# Altium PCB Kit_Rele_v1_PCB.PcbDoc
Units mm, origin at the board's own origin, x right, y up, seen from the top; angles counter-clockwise.
Board outline 50 x 20 mm, 2 copper layers (Top Layer, Bottom Layer), stack 1.671 mm thick; 6 components, 8 nets, 18 pads, 4 vias.
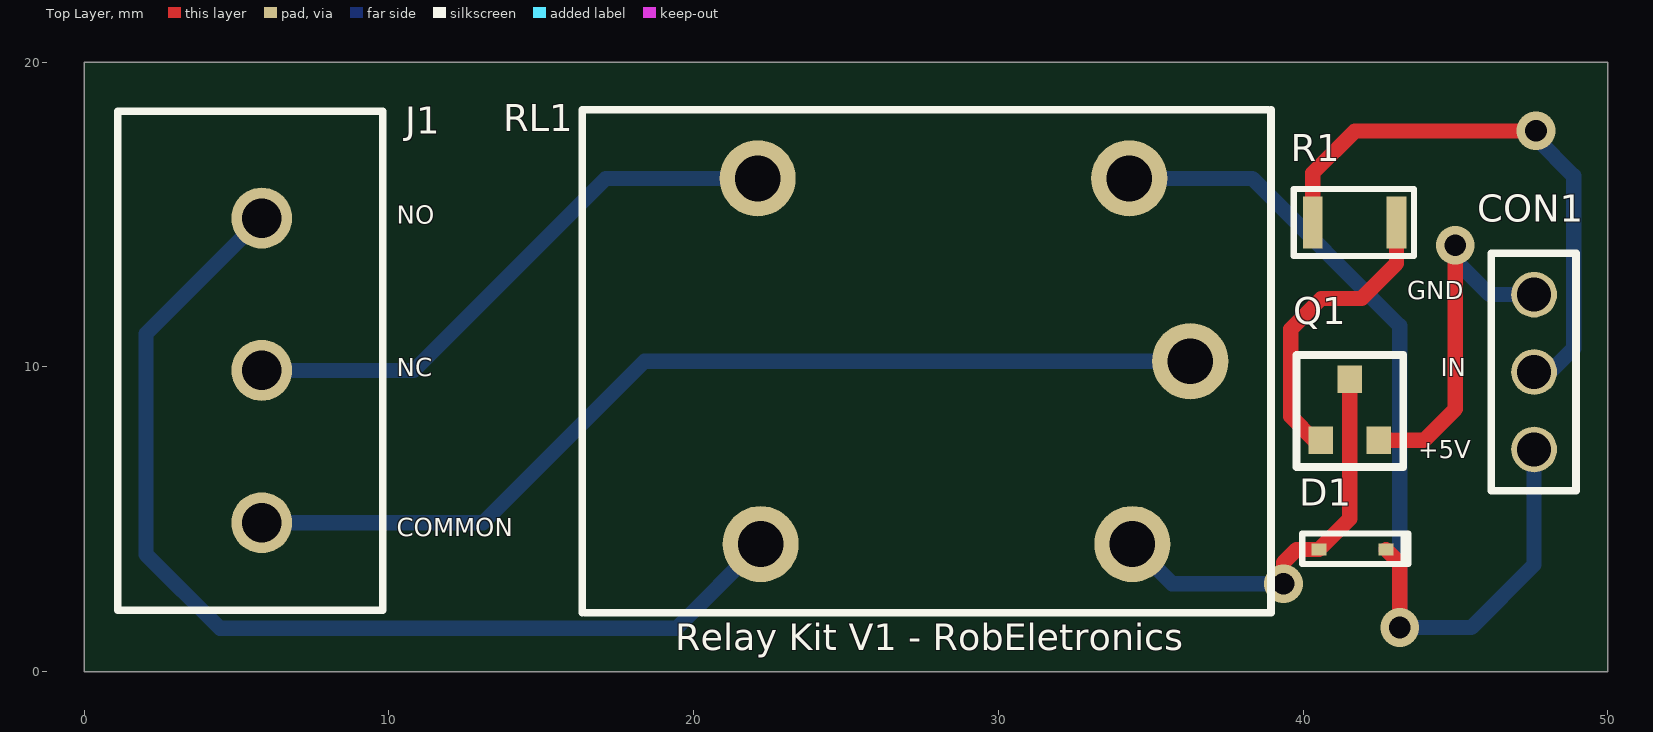
[diagram p0: Top Layer view]
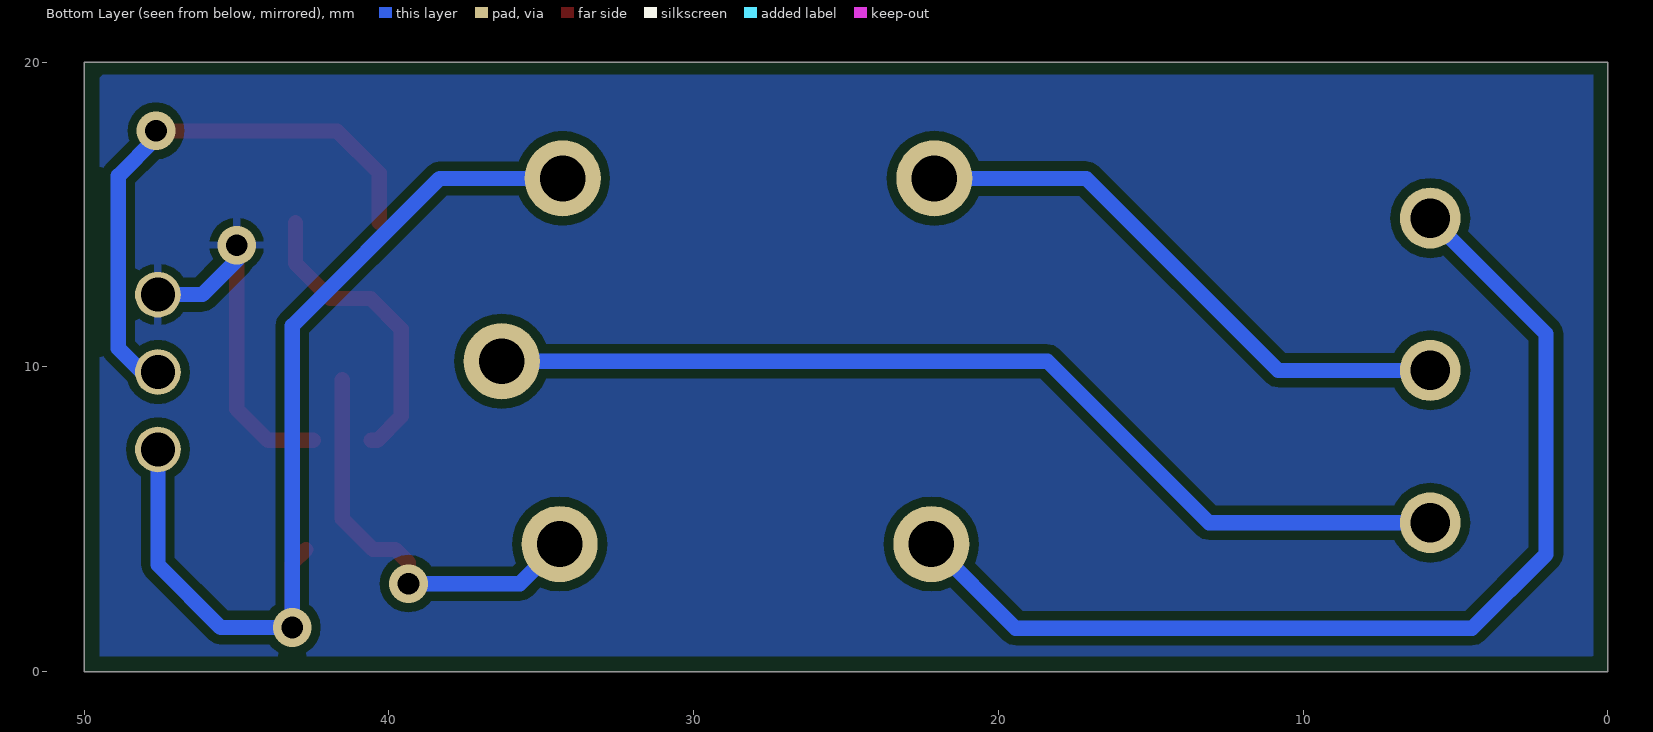
[diagram p1: Bottom Layer view, seen from below]
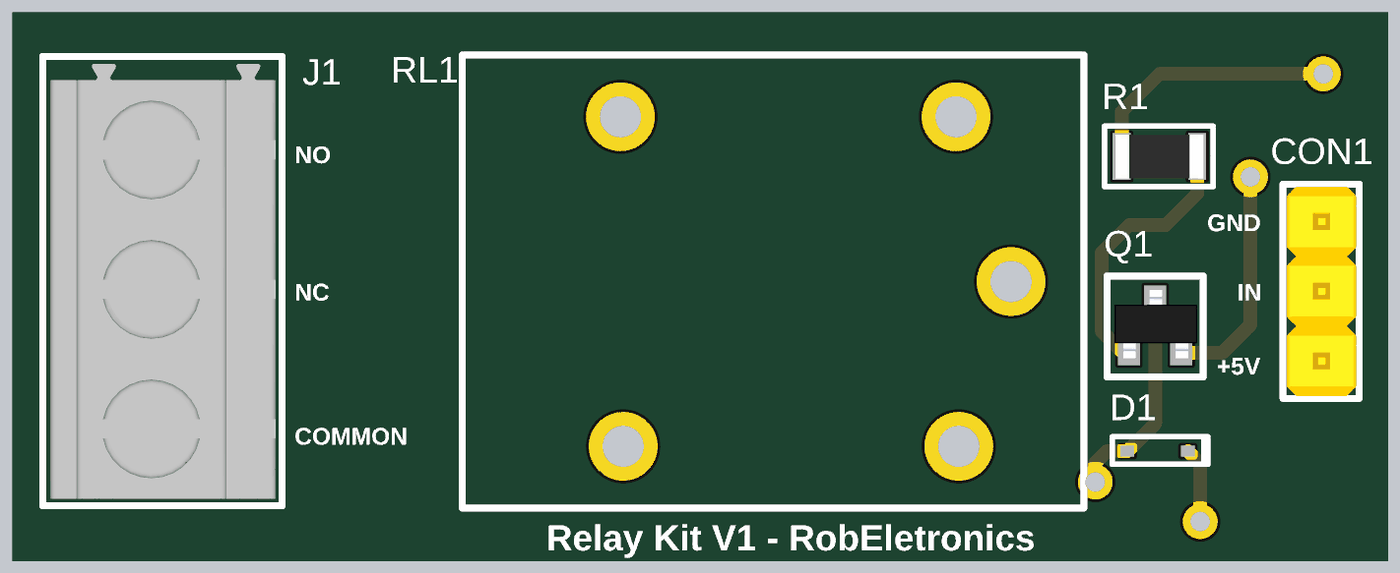
[diagram p2: 3D render of the assembled board from above, using the file's embedded part models]

## Layer stack, top to bottom
Top Solder: solder mask 0.0102, Solder Resist, Dk 3.5
Top Layer: signal copper 0.0356
Dielectric 1: dielectric 1.6, FR-4, Dk 4.8
Bottom Layer: signal copper 0.0356
Bottom Solder: solder mask 0.0102, Solder Resist, Dk 3.5

## Board outline
0,20 0,0 50,0 50,20

## Design rules (kind name [scope] priority, off if disabled: settings)
Clearance [All] p1: gap=0.3 ignorepadtopadclearanceinfootprint=FALSE
PolygonConnect [All] p1: connectstyle=Relief reliefconductorwidth=0.254 reliefentries=4 polygonreliefangle="90 Angle" airgapwidth=0.254
RoutingVias [All] p1: holewidth=0.3 width=0.6 viastyle="Through Hole" minholewidth=0.3 minwidth=0.6 maxholewidth=0.3 maxwidth=0.6
SilkToSolderMaskClearance [IsPad] p1: minsilkscreentomaskgap=0.1 clearancetoexposedcopper=TRUE
SolderMaskExpansion [All] p1: expansion=0.102
Width [All] p1: maxlimit=1 minlimit=0.3 preferedwidth=0.5
29 further rules are at their usual default settings.

## Components (designator, comment, footprint, x,y, rotation, side; value= is the part's Value field where it differs from the comment)
CON1 "CONN HEADER VERT 1x3" "CONN HEADER" 47.585,9.835 r90 top
D1 "DIODE" "DIODE BAT54" 41.626,4.011 r180 top
J1 "Terminal Block 1x3" "Terminal Block" 5.823,9.888 r90 top
Q1 "Transistor NPN" "Transistor SOT-23" 41.511,8.492 r0 top
R1 "Resistor 1K" R1206 41.696,14.746 r180 top
RL1 "Relay" Relay 27.599,10.089 r180 top

## Footprints (in the part's own frame and the unit in brackets; to place one, negate y for a bottom-side part, rotate by r counter-clockwise, add the part's x,y. Pads: shape width x height; smd on the part's side, far side on the other; paste and mask are expansions set on the pad)
"CONN HEADER" [mm]
  round 1.5 hole 1.11: 1(-2.541,0) 2(0,0) 3(2.541,0)
  silkscreen extent -3.9,-1.38 3.9,1.4, body extent -3.81,-1.27 3.81,1.27, height 9.5
"DIODE BAT54" [mm]
  rect 0.5x0.4 smd: 1(-1.1,0) 2(1.1,0)
  silkscreen extent -1.85,-0.53 1.65,0.48, body extent -1.22,-0.43 1.22,0.38, height 1.1
R1206 [mm]
  rect 0.65x1.7 smd: 1(-1.375,0) 2(1.375,0)
  silkscreen extent -1.95,-1.1 2,1.1, body extent -1.6,-0.8 1.6,0.8, height 0.61
Relay [mm]
  round 2.5 hole 1.5: 1(-8.7,-0.1) 2(-6.8,5.9) 3(5.4,5.9) 4(5.5,-6.1) 5(-6.7,-6.1)
  silkscreen extent -11.35,-8.35 11.25,8.15, body extent -11.22,-8.23 11.12,8.03, height 19
"Terminal Block" [mm]
  round 2 hole 1.3: 1(-5,0) 2(0,0) 3(5,0)
  silkscreen extent -7.87,-3.98 8.5,4.72, body extent -7.61,-3.75 8.23,4.45, height 10.01
"Transistor SOT-23" [mm]
  rect 0.8x0.9 smd: 1(0.025,1.1) 2(-0.925,-0.9) 3(0.975,-0.9)
  silkscreen extent -1.73,-1.78 1.78,1.9, body extent -1.45,-1.1 1.55,1.4, height 1.11

## Part data
CON1: library part 61300311121, "Board-To-Board Connector, Vertical, Wr-Phd Series, Through Hole, Header, 3, 2.54 Mm", Color=Black, Manufacturer="Wurth Electronics", Supplier Part Number 1=732-5316-ND, ComponentLink1Description=http://www.farnell.com/cad/1737268.pdf?src-supplier=Element14, ComponentLink1URL=http://www.farnell.com/cad/1737268.pdf?src-supplier=Element14, ComponentLink2Description=https://katalog.we-online.de/em/datasheet/6130xx11121.pdf?src-supplier=Digi-Key, ComponentLink2URL=https://katalog.we-online.de/em/datasheet/6130xx11121.pdf?src-supplier=Digi-Key, Connector Type="Male Pin", Contact Material=Copper, Contact Mating Length=0.236inch, Contact Plating=Gold, Cotegory=Connectors, Gender=Male, Lead Free="Lead Free", Manufacturer Part Number=61300311121, Mount="Through Hole", Number of Contacts=3, Number of Positions=3, Number of Rows=1, Packaging=Bulk, Pitch=0.1inch, Pricing 1="1=0.13, 10=0.106, 25=0.088, 50=0.074, 100=0.067, 1000=0.061 (USD)", REACH SVHC=Unknown, Stock 1=109382, Supplier 1=Digi-Key, Termination=Solder
D1: library part BAT54HT1G, "Small Signal Schottky Diode, Single, 30 V, 200 mA, 800 mV, 600 mA, 150 C ;RoHS Compliant: Yes", Average Rectified Current=200mA, Capacitance=10pF, Forward Voltage=800mV, Manufacturer="ON Semiconductor / Fairchild", Max Forward Surge Current (Ifsm)=600mA, Max Operating Temperature=150°C, Max Repetitive Reverse Voltage (Vrrm)=30V, Max Reverse Leakage Current=2uA, Min Operating Temperature=-55°C, Package Quantity=3000, Power Dissipation=200mW, Supplier Part Number 1=BAT54HT1GOSCT-ND, Category=Diode, ComponentLink1Description=http://www.fairchildsemi.com/datasheets/BA/BAT54HT1G.pdf?src-supplier=Digi-Key, ComponentLink1URL=http://www.fairchildsemi.com/datasheets/BA/BAT54HT1G.pdf?src-supplier=Digi-Key, ComponentLink2Description=http://www.farnell.com/datasheets/2251626.pdf?src-supplier=Element14, ComponentLink2URL=http://www.farnell.com/datasheets/2251626.pdf?src-supplier=Element14, ComponentLink3Description=http://www.jameco.com/Jameco/Products/ProdDS/806549.pdf?src-supplier=Jameco, ComponentLink3URL=http://www.jameco.com/Jameco/Products/ProdDS/806549.pdf?src-supplier=Jameco, ComponentLink4Description=http://www.farnell.com/datasheets/2251626.pdf?src-supplier=Newark, ComponentLink4URL=http://www.farnell.com/datasheets/2251626.pdf?src-supplier=Newark, ComponentLink5Description=http://www.mouser.com/ds/2/149/BAT54HT1G-104602.pdf?src-supplier=Mouser, ComponentLink5URL=http://www.mouser.com/ds/2/149/BAT54HT1G-104602.pdf?src-supplier=Mouser, ComponentLink6Description=http://www.farnell.com/datasheets/1727620.pdf?src-supplier=Element14, ComponentLink6URL=http://www.farnell.com/datasheets/1727620.pdf?src-supplier=Element14, ComponentLink7Description=https://media.digikey.com/pdf/Data%20Sheets/Fairchild%20PDFs/BAT54HT1G_Rev_1.2.pdf?src-supplier=Avnet, ComponentLink7URL=https://media.digikey.com/pdf/Data%20Sheets/Fairchild%20PDFs/BAT54HT1G_Rev_1.2.pdf?src-supplier=Avnet, ComponentLink8Description=http://www.onsemi.com/pub/Collateral/BAT54HT1-D.PDF?src-supplier=Avnet, ComponentLink8URL=http://www.onsemi.com/pub/Collateral/BAT54HT1-D.PDF?src-supplier=Avnet, ComponentLink9Description=http://www.onsemi.com/pub/Collateral/BAT54HT1-D.PDF?src-supplier=Digi-Key, ComponentLink9URL=http://www.onsemi.com/pub/Collateral/BAT54HT1-D.PDF?src-supplier=Digi-Key, ComponentLink10Description=http://uk.rs-online.com/webdocs/11a6/0900766b811a63a9.pdf?src-supplier=RSComponents, ComponentLink10URL=http://uk.rs-online.com/webdocs/11a6/0900766b811a63a9.pdf?src-supplier=RSComponents, ComponentLink11Description=https://media.digikey.com/pdf/Data%20Sheets/Fairchild%20PDFs/BAT54HT1G_Rev_1.2.pdf?src-supplier=Mouser, ComponentLink11URL=https://media.digikey.com/pdf/Data%20Sheets/Fairchild%20PDFs/BAT54HT1G_Rev_1.2.pdf?src-supplier=Mouser, ComponentLink12Description=http://www.fairchildsemi.com/ds/BA/BAT54HT1G.pdf?src-supplier=Future+Electronics, ComponentLink12URL=http://www.fairchildsemi.com/ds/BA/BAT54HT1G.pdf?src-supplier=Future+Electronics, ComponentLink13Description=http://www.produktinfo.conrad.com/datenblaetter/1200000-1299999/001262925-da-01-en-DIODE_SCHOTTKY_30V_BAT54HT1G_SOD_323_FSC.pdf?src-supplier=Conrad, ComponentLink13URL=http://www.produktinfo.conrad.com/datenblaetter/1200000-1299999/001262925-da-01-en-DIODE_SCHOTTKY_30V_BAT54HT1G_SOD_323_FSC.pdf?src-supplier=Conrad, Contact Plating=Tin,Matte, Current Rating=200mA, Element Configuration=Single, Forward Current=200mA, Height=1mm, Lead Free="Lead Free", Length=1.8mm, Manufacturer Part Number=BAT54HT1G, Max Reverse Voltage (DC)=30V, Max Surge Current=600mA, Mount="Surface Mount", Number of Pins=2, Output Current=200mA, Packaging="Tape and Reel", Peak Non-Repetitive Surge Current=600mA, Peak Reverse Current=2uA, Polarity=Standard, Pricing 1="1=0.2, 10=0.181, 25=0.1724, 100=0.0759, 500=0.05962, 1000=0.0414 (USD)", Radiation Hardening=No, REACH SVHC="No SVHC", Recovery Time=5ns, Reverse Recovery Time=5ns, Reverse Voltage=30V, Stock 1=221756, Supplier 1=Digi-Key, Voltage Rating (DC)=30V, Width=1.35mm
J1: library part 1935174, "PHOENIX CONTACT - PT1,5/3-5.0-H - Wire-To-Board Terminal Block, 5 mm, 3 Ways, 26 AWG, 16 AWG, 1.5 mm², Screw", Color=Green, Current=18A, Current Rating=17.5A, Flammability Rating="UL94 V-0", Manufacturer="Phoenix Contact", Max Current Rating=16A, Max Supply Voltage=250V, Package Quantity=250, Supplier Part Number 1=277-1578-ND, Voltage=300V, Voltage Rating (DC)=320V, Approvals=UL,VDE,CB, Category=Connectors, ComponentLink1Description=https://media.digikey.com/pdf/Data%20Sheets/Phoenix%20Contact%20PDFs/1935174.pdf?src-supplier=Digi-Key, ComponentLink1URL=https://media.digikey.com/pdf/Data%20Sheets/Phoenix%20Contact%20PDFs/1935174.pdf?src-supplier=Digi-Key, ComponentLink2Description=https://www.verical.com/server-webapp/html/getDatasheet?partID=212213&src-supplier=Verical, ComponentLink2URL=https://www.verical.com/server-webapp/html/getDatasheet?partID=212213&src-supplier=Verical, ComponentLink3Description=https://produktinfo.conrad.com/datenblaetter/725000-749999/744167-da-01-en-PRINTKLEMME_PT_1_5__3_5_0_H.pdf?src-supplier=Conrad, ComponentLink3URL=https://produktinfo.conrad.com/datenblaetter/725000-749999/744167-da-01-en-PRINTKLEMME_PT_1_5__3_5_0_H.pdf?src-supplier=Conrad, Contact Material=Copper,Tin, Depth=9mm, Height=11.3mm, Housing Color=Green, Housing Material=Polyamide, Insulation Material=Nylon, Lead Free="Lead Free", Length=9mm, Manufacturer Part Number=1935174, Material=Nylon, Mount="Through Hole", Number of Circuits=3, Number of Contacts=3, Number of Levels=1, Number of Pins=3, Number of Poles=3, Number of Positions=3, Number of Positions Per Level=3, Number of Rows=1, Orientation=Straight, Packaging=Bulk, Pitch=5mm, Pricing 1="1=0.6, 10=0.58, 50=0.5544, 100=0.5393, 250=0.504, 500=0.46368, 1000=0.4284, 2500=0.42838 (USD)", Radiation Hardening=No, REACH SVHC=Unknown, Stock 1=27165, Stripping Length=5mm, Supplier 1=Digi-Key, Termination=Solder, Voltage Rating=250V, Weight=0.100531oz, Width=15mm, Wire/Cable Gauge=26AWG, Wire Gauge (Max)=26AWG, Wire Gauge (Min)=12AWG
Q1: library part MMBT3904-TP, "TRANS NPN 40V 0.2A SOT23", Case/Package=SOT-23, Collector Base Voltage (VCBO)=60V, Collector Emitter Breakdown Voltage=40V, Collector Emitter Saturation Voltage=300mV, Current Rating=100mA, Emitter Base Voltage (VEBO)=6V, Frequency=300MHz, Manufacturer=MCC, Max Collector Current=200mA, Max Operating Temperature=150°C, Max Power Dissipation=350mW, Min Operating Temperature=-55°C, Package Quantity=1, Supplier Part Number 1=MMBT3904TPMSDKR-ND, Category=Transistor, Collector Emitter Voltage (VCEO)=40V, ComponentLink1Description=http://www.mccsemi.com/up_pdf/MMBT3904(SOT-23).pdf?src-supplier=Digi-Key, ComponentLink1URL=http://www.mccsemi.com/up_pdf/MMBT3904(SOT-23).pdf?src-supplier=Digi-Key, ComponentLink2Description=http://www.alliedelec.com/images/products/datasheets/bm/MCC/70055699.pdf?src-supplier=Allied+Electronics, ComponentLink2URL=http://www.alliedelec.com/images/products/datasheets/bm/MCC/70055699.pdf?src-supplier=Allied+Electronics, ComponentLink3Description=http://www.mccsemi.com/up_pdf/MMBT3904T(SOT-523).PDF?src-supplier=Future+Electronics, ComponentLink3URL=http://www.mccsemi.com/up_pdf/MMBT3904T(SOT-523).PDF?src-supplier=Future+Electronics, ComponentLink4Description=http://www.mouser.com/ds/2/258/MMBT3904(SOT-23)-350032.pdf?src-supplier=Mouser, ComponentLink4URL=http://www.mouser.com/ds/2/258/MMBT3904(SOT-23)-350032.pdf?src-supplier=Mouser, ComponentLink5Description=https://www.verical.com/server-webapp/html/getDatasheet?partID=251950&src-supplier=Verical, ComponentLink5URL=https://www.verical.com/server-webapp/html/getDatasheet?partID=251950&src-supplier=Verical, Element Configuration=Single, Gain Bandwidth Product=300MHz, Height=1.12mm, hFE Min=40, Lead Free="Lead Free", Length=3.04mm, Manufacturer Part Number=MMBT3904-TP, Max Breakdown Voltage=40V, Max Frequency=300MHz, Mount="Surface Mount", Number of Elements=1, Number of Pins=3, Packaging="Tape and Reel", Polarity=NPN, Power Dissipation=350mW, Pricing 1="1=0.1, 10=0.076, 25=0.0724, 100=0.0319, 500=0.02506, 1000=0.0174 (USD)", Radiation Hardening=No, Stock 1=530270, Supplier 1=Digi-Key, Transition Frequency=300MHz, Voltage Rating (DC)=40V, Width=1.4mm
R1: library part RC1206JR-071KL, "RES SMD 1K OHM 5% 1/4W 1206", Case/Package=1206, Case Code (Metric)=3216, Manufacturer=Yageo, Max Operating Temperature=155°C, Max Power Dissipation=250mW, Min Operating Temperature=-55°C, Package Quantity=1, Resistance=1kR, Supplier Part Number 1=311-1.0KERDKR-ND, Temperature Coefficient=100ppm/°C, Tolerance=5%, Voltage Rating=200V, Case Code (Imperial)=1206, Category="Chip Resistor - Surface Mount", ComponentLink1Description=http://www.yageo.com/documents/recent/PYu-RC_Group_51_RoHS_L_10.pdf?src-supplier=Digi-Key, ComponentLink1URL=http://www.yageo.com/documents/recent/PYu-RC_Group_51_RoHS_L_10.pdf?src-supplier=Digi-Key, ComponentLink2Description=http://www.yageo.com/documents/recent/PYu-RC_Group_51_RoHS_L_9.pdf?src-supplier=Digi-Key, ComponentLink2URL=http://www.yageo.com/documents/recent/PYu-RC_Group_51_RoHS_L_9.pdf?src-supplier=Digi-Key, Composition="Thick Film", Depth=1.6mm, Height=0.026inch, Lead Free="Lead Free", Length=3.1mm, Manufacturer Part Number=RC1206JR-071KL, Military Standard=Not, Number of Terminations=2, Packaging="Tape and Reel", Power Rating=250mW, Pricing 1="1=0.1, 10=0.059, 100=0.024, 1000=0.01079, 2500=0.00936 (USD)", REACH SVHC=Unknown, Stock 1=2036007, Supplier 1=Digi-Key, Termination=SMD/SMT, Width=0.063inch
RL1: library part G5LE-1-36DC5, "RELAY GEN PURPOSE SPDT 10A 5V", Coil Current=72mA, Coil Power=360mW, Coil Resistance=70R, Coil Voltage (DC)=5V, Contact Current Rating=10A, Manufacturer=Omron, Max Operating Temperature=85°C, Max Voltage Rating (AC)=250V, Max Voltage Rating (DC)=125V, Min Operating Temperature=-25°C, Package Quantity=500, Supplier Part Number 1=G5LE-1-36DC5-ND, Category=Relays, Coil Type=Non-Latching, ComponentLink1Description=https://omronfs.omron.com/en_US/ecb/products/pdf/en-g5le.pdf?src-supplier=Digi-Key, ComponentLink1URL=https://omronfs.omron.com/en_US/ecb/products/pdf/en-g5le.pdf?src-supplier=Digi-Key, Contact Material=Tin,Silver, Manufacturer Part Number=G5LE-1-36DC5, Max Current Rating=10A, Mount="Through Hole", Number of Pins=5, Operate Time=10ms, Packaging=Tray, Pricing 1="1=1.45, 10=1.361, 25=1.21, 50=1.1494, 100=1.0888, 250=0.96784, 500=0.90736, 1000=0.84686, 5000=0.81662 (USD)", Relay Type="General Purpose", Release Time=5ms, Stock 1=186, Supplier 1=Digi-Key, Termination="PC Pin", Throw Configuration=SPDT, Weight=12g

## Via types
v1: diameter 1.27, hole 0.711, Top Layer to Bottom Layer, 4 vias

## Nets (pads, with @x,y where several pads share a name; then routed paths per layer and width w, separated by ;. In a path a pad name is that pad's centre, name@x,y a point inside that pad or via, vN(x,y) a via of type N, cw(c..) or ccw(c..) an arc to the next point about the centre after c; other vN are vias at no path point)
+5V: CON1.1 D1.1 RL1.5 | length 32.8
  Top Layer w0.5: D1.1 43.175,3.562 v1(43.175,1.45) v1@43.049,1.576
  Bottom Layer w0.5: RL1.5 38.336,16.189 43.175,11.35 v1(43.175,1.45) 45.525,1.45 47.585,3.51 CON1.1
GND: CON1.3 Q1.3 | length 11.9
  Top Layer w0.5: Q1.3 43.967,7.592 45,8.625 v1(45,14)
  Bottom Layer w0.5: v1(45,14) 45,13.5 46.124,12.376 CON1.3
NetCON1_2: CON1.2 R1.2 | length 18.8
  Top Layer w0.5: R1.2 40.321,16.371 41.7,17.75 v1(47.65,17.75)
  Bottom Layer w0.5: CON1.2 48.11,9.835 48.885,10.61 48.885,16.275 47.65,17.51 v1(47.65,17.75)
NetD1_2: D1.2 Q1.1 RL1.2 | length 13.5
  Top Layer w0.5: v1(39.361,2.889) 39.361,3.586 39.786,4.011 D1.2 41.536,5.021 Q1.1
  Bottom Layer w0.5: RL1.2 35.699,2.889 v1(39.361,2.889)
NetJ1_1: J1.1 RL1.1 | length 32.7
  Bottom Layer w0.5: J1.1 13.088,4.888 18.389,10.189 RL1.1
NetJ1_2: J1.2 RL1.4 | length 18.9
  Bottom Layer w0.5: J1.2 10.813,9.888 17.114,16.189 RL1.4
NetJ1_3: J1.3 RL1.3 | length 34.9
  Bottom Layer w0.5: J1.3 2.025,11.09 2.025,3.85 4.45,1.425 19.435,1.425 RL1.3
NetQ1_2: Q1.2 R1.1 | length 9.9
  Top Layer w0.5: Q1.2 40.383,7.592 39.6,8.375 39.6,11.25 40.6,12.25 41.925,12.25 43.071,13.396 R1.1

## Polygon pours and split planes (outlines as drawn)
GND on Bottom Layer "Bottom Layer-GND" (solid, pour order 6): 0.475,19.6 0.475,0.525 0.5,0.5 49.5,0.5 49.5,19.5 49.4,19.6
GND on Bottom Layer "Bottom Layer-GND 1" (solid, pour order 4): 66,13
no net on Bottom Layer "Bottom Layer-No Net" (solid, pour order 0): 0.475,19.6

## Silkscreen, mask and mechanical layers (free items; w line width, h text height)
Top Overlay:
  text "NO" at 10.25,14.5 h1
  text "GND" at 43.425,12.025 h1
  text "NC" at 10.25,9.5 h1
  text "IN" at 44.525,9.5 h1
  text "+5V" at 43.775,6.8 h1
  text "COMMON" at 10.25,4.25 h1
  text "Relay Kit V1 - RobEletronics" at 19.4,0.4 h1.5
Board Outline:
  the board outline again, w0.1